# EAGLE board PCB (EAGLE 9.7.0)
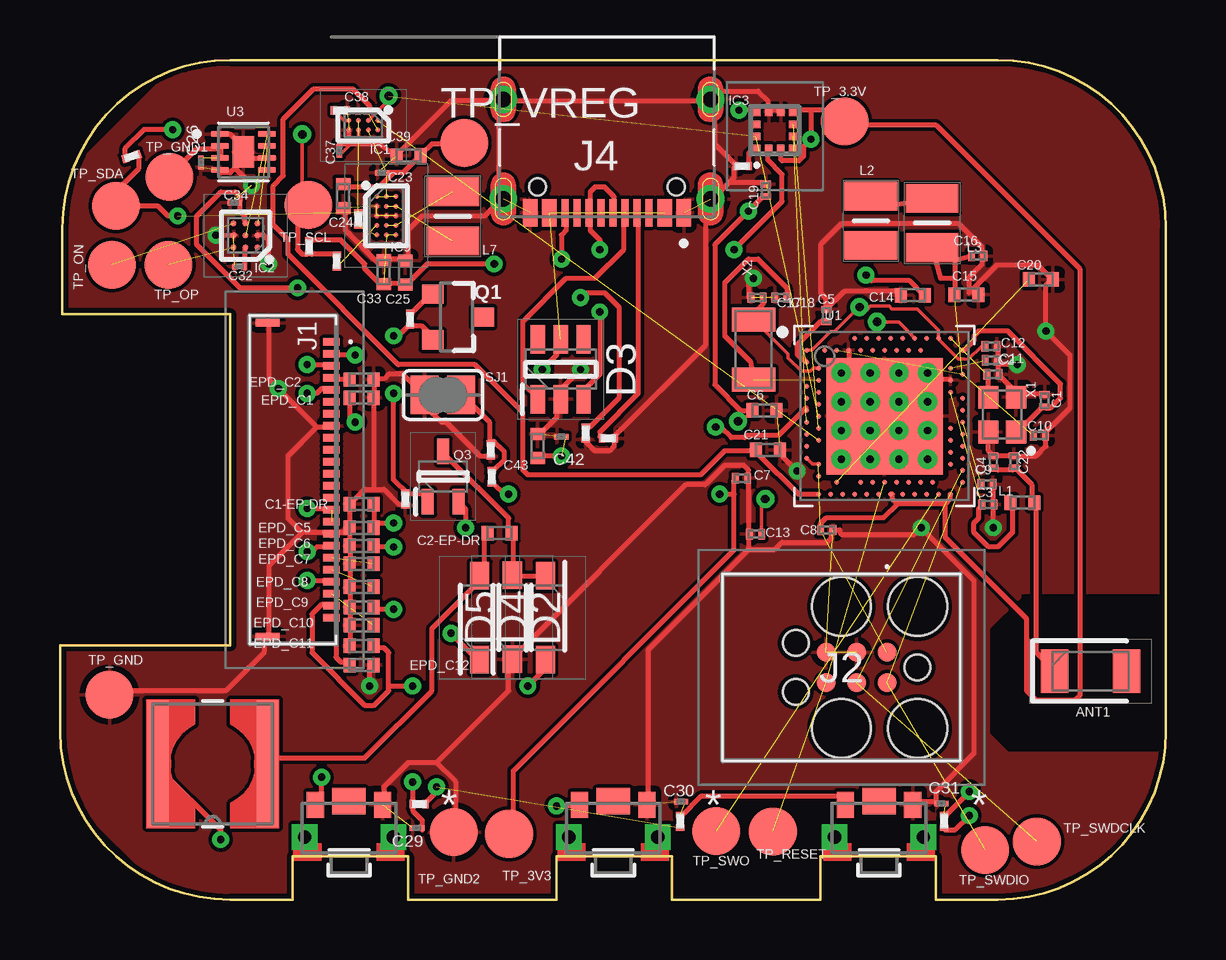
[diagram p0: board, top side]
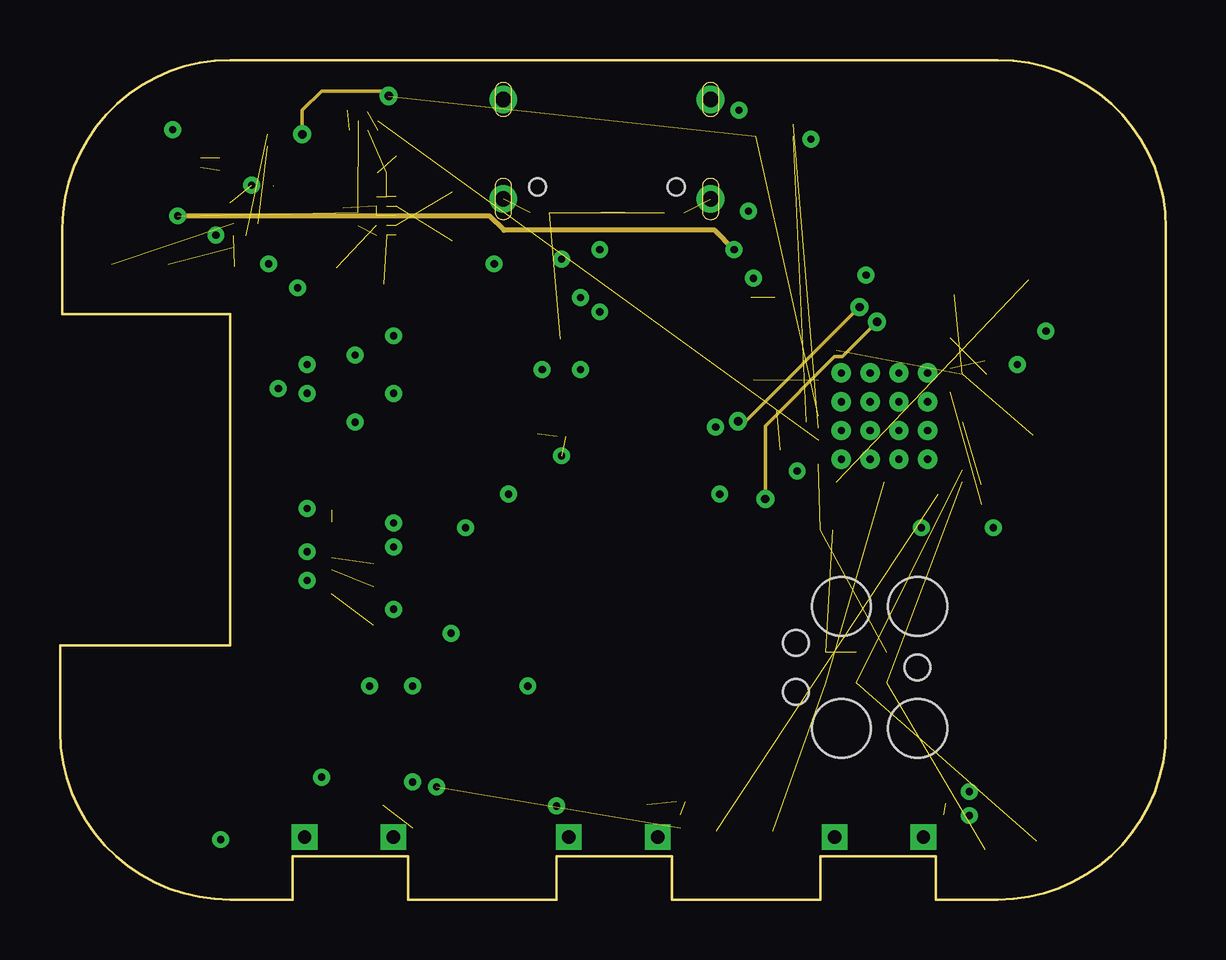
[diagram p1: board, inner layer Route2]
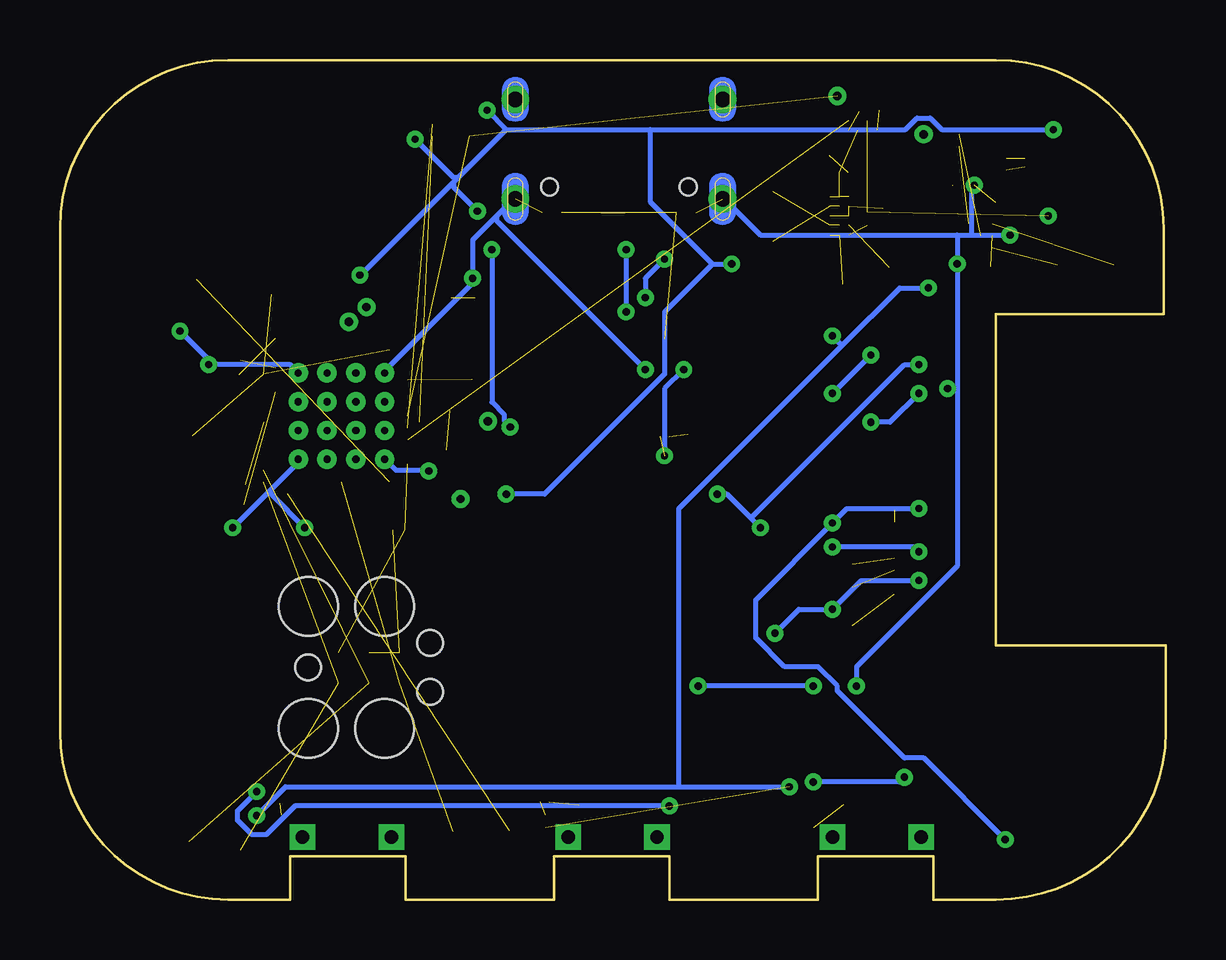
[diagram p2: board, bottom side, seen from below]

Size 46.1 x 35 mm. Coordinates in mm from the lower left corner, seen from the top.
Outline: 7.1,35 39.1,35 arc-90 46.1,28 46.1,7 arc-90 39.1,0 36.5,0 36.5,1.8 31.7,1.8 31.7,0 25.5,0 25.5,1.8 20.7,1.8 20.7,0 14.5,0 14.5,1.8 9.7,1.8 9.7,0 7.1,0 arc-90 0,7 0,10.6 7.1,10.6 7.1,24.4 0.1,24.4 0.1,28 arc-90 7.1,35
Copper layers (1+2*15+16): Top / Route2 / Route63 / Bottom
Stack-up 4 Layer Stack: Top SilkScreen Epoxy Ink / Top SolderMask SR:Green 0.0254mm Dk 4.3 / Top Surface Finish Lead-Free 0.02mm / Top CuFoil:007 0.035mm / Dielectric-1 Prepreg:001 0.064mm / Dielectric-2 Prepreg:001 0.064mm / Route2 CuFoil:007 0.035mm / Dielectric-3 Core:066 0.711mm / Route63 CuFoil:007 0.035mm / Dielectric-4 Prepreg:001 0.064mm / Dielectric-5 Prepreg:001 0.064mm / Bottom CuFoil:007 0.035mm / Bottom Surface Finish Lead-Free 0.02mm / Bottom SolderMask SR:Green 0.0254mm Dk 4.3 / Bottom SilkScreen Epoxy Ink
Design rules: minimum copper width 0.15mm, minimum drill size 0.2mm, copper clearance wire_polygon to wire_polygon 0.15mm, copper clearance wire_polygon to pad_smd 0.15mm, copper clearance wire_polygon to via 0.15mm, copper clearance pad_smd to pad_smd 0.15mm, copper clearance pad_smd to via 0.15mm, copper clearance via to via 0.15mm, copper clearance smd to pad (same net) 0.15mm, copper clearance smd to via (same net) 0.15mm, copper clearance smd to smd (same net) 0.15mm, dimension clearance 0.2mm, via restrict clearance 0mil, restrict clearance 0mil, drill distance 0.15mm, keepout clearance 0mil
RestrictTop: 2 lines
RestrictBottom: 7 lines
RestrictVias: 7 lines

## Footprints (pad centres in the part's own frame; a part is rotated, then mirrored left to right if it is on the bottom)
2450AT18B100E_ANTC3216X140N = smd 1.15 x 1.8: 1 -1.5,0; 2 1.5,0
NORDIC_NRF_3_RESC0201_L = smd 0.28 x 0.43: 1 -0.255,0; 2 0.255,0
NORDIC_NRF_3_RESC0402_L = smd 0.5 x 0.6: 1 -0.5,0; 2 0.5,0
GRM011R60J152KE01L_2_CAPC0201X13N = smd 0.22 x 0.23: 1 -0.185,0; 2 0.185,0
ESP32_C6_LIBRARY_5_SOD3716X135N = smd 1.15 x 0.8: 1 -1.75,0; 2 1.75,0
ESP32_C6_LIBRARY_3_SOT95P280X145-6N = smd 1.2 x 0.6: 1 -1.25,0.95; 2 -1.25,0; 3 -1.25,-0.95; 4 1.25,-0.95; 5 1.25,0; 6 1.25,0.95
BQ25180YBGR_BGA8C40P2X4_100X155X50 = smd 0.2 x 0.2: A1 -0.2,0.6; A2 0.2,0.6; B1 -0.2,0.2; B2 0.2,0.2; C1 -0.2,-0.2; C2 0.2,-0.2; D1 -0.2,-0.6; D2 0.2,-0.6
DRV2605YZFR_BGA9C50P3X3_144X144X62 = smd 0.25 x 0.25: A1 -0.5,0.5; A2 0,0.5; A3 0.5,0.5; B1 -0.5,0; B2 0,0; B3 0.5,0; C1 -0.5,-0.5; C2 0,-0.5; C3 0.5,-0.5
BMA423_BMA423 = smd 0.3 x 0.35: 1 -0.75,-0.775; 2 -0.25,-0.775; 3 0.25,-0.775; 4 0.75,-0.775; 7 0.75,0.775; 8 0.25,0.775; 9 -0.25,0.775; 10 -0.75,0.775 | smd 0.35 x 0.3: 5 0.775,-0.25; 6 0.775,0.25; 11 -0.775,0.25; 12 -0.775,-0.25
RT6160AWSC_BGA15C40P3X5_140X230X60 = smd 0.216 x 0.216: A1 -0.4,0.8; A2 0,0.8; A3 0.4,0.8; B1 -0.4,0.4; B2 0,0.4; B3 0.4,0.4; C1 -0.4,0; C2 0,0; C3 0.4,0; D1 -0.4,-0.4; D2 0,-0.4; D3 0.4,-0.4; E1 -0.4,-0.8; E2 0,-0.8; E3 0.4,-0.8
503480-2400_5034802400 = smd 0.3 x 0.7: 1 -5.75,1.525; 2 -5.25,1.525; 3 -4.75,1.525; 4 -4.25,1.525; 5 -3.75,1.525; 6 -3.25,1.525; 7 -2.75,1.525; 8 -2.25,1.525; 9 -1.75,1.525; 10 -1.25,1.525; 11 -0.75,1.525; 12 -0.25,1.525; 13 0.25,1.525; 14 0.75,1.525; 15 1.25,1.525; 16 1.75,1.525; 17 2.25,1.525; 18 2.75,1.525; 19 3.25,1.525; 20 3.75,1.525; 21 4.25,1.525; 22 4.75,1.525; 23 5.25,1.525; 24 5.75,1.525 | smd 0.3 x 1: MP1 -6.54,-1.125; MP2 6.54,-1.125
TC2030-IDC_TC2030IDC = smd 0.783 x 0.783: 1 -0.953,-0.635; 2 -0.953,0.635; 3 0.317,-0.635; 4 0.317,0.635; 5 1.588,-0.635; 6 1.588,0.635 | hole 2.451: -2.223,-2.54; -2.223,2.54; 0.952,-2.54; 0.952,2.54 | hole 1.067: -2.223,0; 2.857,-1.016; 2.857,1.016
KH-TYPE-C-16P_KINGHELM_KH-TYPE-C-16P = smd 0.6 x 1.15: A1_B12 -3.2,4.725; A4_B9 -2.4,4.725; A9_B4 2.4,4.725; A12_B1 3.2,4.725 | smd 0.3 x 1.15: A5 -1.25,4.725; A6 -0.25,4.725; A7 0.25,4.725; A8 1.25,4.725; B5 1.75,4.725; B6 0.75,4.725; B7 -0.75,4.725; B8 -1.75,4.725 | drill 0.65 pad 1.05: SH1 -4.32,0; SH2 4.32,0; SH3 -4.32,4.15; SH4 4.32,4.15 | hole 0.7: -2.89,3.65; 2.89,3.65
NORDIC_NRF_2_RESC0402_L = smd 0.5 x 0.6: 1 -0.5,0; 2 0.5,0
MLP2016SR47MT0S1_INDC2016X100N = smd 1.2 x 2.2: 1 -1.028,0; 2 1.028,0
ESP32_C6_LIBRARY_2_IND_4828-WE-TPC_WRE = smd 0.9 x 5.3: 1 -2.286,0; 2 2.286,0
ESP32_C6_LIBRARY_4_ESP32_C6_LIBRARY_4_ESP32_C6_LIBRARY_4_ESP32_C6_LIBRARY_4_ESP32_WROVER_SPARKFUN-DISCRETESEMI_SOT23-3 = smd 0.8 x 0.9: 1 -0.95,-1; 2 0.95,-1; 3 0,1.1
ESP32_C6_LIBRARY_6_SOT65P210X110-3N = smd 1.05 x 0.5: 1 -1.05,0.65; 2 -1.05,-0.65; 3 1.05,0
CPF0201D7K68C1_0201 = smd 0.35 x 0.25: 1 0,0.275; 2 0,-0.275
ESP32_C6_LIBRARY_7_JUMPER_SJ = smd 1.168 x 1.6: 1 -0.762,0; 2 0.762,0
2025-10-22_07-23-44_LIBRARY_SW_EVP-AKE31A_PAN = smd 0.711 x 1.092: 1 -1.4,-0.972; 2 1.4,-0.972 | drill 0.559 pad 0.914 square: 3 -1.848,0.381; 4 1.848,0.381 | smd 1.397 x 1.092: 5 0,-1.124
HECTOR_WATCH_1_TP20R = smd 2 x 2: TP 0,0
NORDIC_NRF_4_AQFN50P700X700X85_HS-74N = smd 4.85 x 4.85: P$74 0,0 | drill 0.3 pad 0.6: P$75 -1.8,1.8; P$76 -0.6,1.8; P$77 0.6,1.8; P$78 1.8,1.8; P$79 -1.8,0.6; P$80 -0.6,0.6; P$81 0.6,0.6; P$82 1.8,0.6; P$83 -1.8,-0.6; P$84 -0.6,-0.6; P$85 0.6,-0.6; P$86 1.8,-0.6; P$87 -1.8,-1.8; P$88 -0.6,-1.8; P$89 0.6,-1.8; P$90 1.8,-1.8 | smd 0.2 x 0.2: P$A8 -1.25,3.25; P$A10 -0.75,3.25; P$A12 -0.25,3.25; P$A14 0.25,3.25; P$A16 0.75,3.25; P$A18 1.25,3.25; P$A20 1.75,3.25; P$A22 2.25,3.25; P$A23 2.75,3.25; P$AA24 3.25,-2.25; P$AB2 -2.75,-2.5; P$AC5 -2,-2.75; P$AC9 -1,-2.75; P$AC11 -0.5,-2.75; P$AC13 0,-2.75; P$AC15 0.5,-2.75; P$AC17 1,-2.75; P$AC19 1.5,-2.75; P$AC21 2,-2.75; P$AC24 3.25,-2.75; P$AD2 -2.75,-3.25; P$AD4 -2.25,-3.25; P$AD6 -1.75,-3.25; P$AD8 -1.25,-3.25; P$AD10 -0.75,-3.25; P$AD12 -0.25,-3.25; P$AD14 0.25,-3.25; P$AD16 0.75,-3.25; P$AD18 1.25,-3.25; P$AD20 1.75,-3.25; P$AD22 2.25,-3.25; P$AD23 2.75,-3.25; P$B1 -3.25,2.75; P$B3 -2.5,2.75; P$B5 -2,2.75; P$B7 -1.5,2.75; P$B9 -1,2.75; P$B11 -0.5,2.75; P$B13 0,2.75; P$B15 0.5,2.75; P$B17 1,2.75; P$B19 1.5,2.75; P$B24 3.25,2.75; P$C1 -3.25,2.25; P$D2 -2.75,2; P$D23 2.75,2; P$E24 3.25,1.75; P$F2 -2.75,1.5; P$F23 2.75,1.5; P$G1 -3.25,1.25; P$H2 -2.75,1; P$H23 2.75,1; P$J1 -3.25,0.75; P$J24 3.25,0.75; P$K2 -2.75,0.5; P$L1 -3.25,0.25; P$L24 3.25,0.25; P$M2 -2.75,0; P$N1 -3.25,-0.25; P$N24 3.25,-0.25; P$P2 -2.75,-0.5; P$P23 2.75,-0.5; P$R1 -3.25,-0.75; P$R24 3.25,-0.75; P$T2 -2.75,-1; P$T23 2.75,-1; P$U1 -3.25,-1.25; P$U24 3.25,-1.25; P$V23 2.75,-1.5; P$W1 -3.25,-1.75; P$W24 3.25,-1.75; P$Y2 -2.75,-2; P$Y23 2.75,-2
ESP32_C6_LIBRARY_SON50P200X200X80-9N = smd 0.76 x 0.27: 1 -0.985,0.75; 2 -0.985,0.25; 3 -0.985,-0.25; 4 -0.985,-0.75; 5 0.985,-0.75; 6 0.985,-0.25; 7 0.985,0.25; 8 0.985,0.75 | smd 0.9 x 1.3: 9 0,0
NORDIC_NRF_BT-XTAL_2016_N = smd 0.95 x 0.85: 1 -0.725,-0.575; 2 0.725,-0.575; 3 0.725,0.575; 4 -0.725,0.575
NORDIC_NRF_1_XTAL_3215_N = smd 1 x 1.8: 1 -1.25,0; 2 1.25,0

## Placement (x,y rotation side)
ANT1  2450AT18B100E  [2450AT18B100E_ANTC3216X140N]  42.96,9.52 0 top
C1  12pF  [NORDIC_NRF_3_RESC0201_L]  41.04,20.79 90 top
C1-EP-DR  10uF  [NORDIC_NRF_3_RESC0402_L]  12.57,16.48 180 top
C2  12pF  [NORDIC_NRF_3_RESC0201_L]  38.89,21.89 0 top
C2-EP-DR  4.7uF/25V  [NORDIC_NRF_3_RESC0402_L]  18.31,15.27 180 top
C3  1pF  [NORDIC_NRF_3_RESC0201_L]  38.68,16.47 0 top
C4  1pF  [NORDIC_NRF_3_RESC0201_L]  38.9,18.24 90 top
C5  100nF  [NORDIC_NRF_3_RESC0201_L]  31.95,24.35 90 top
C6  4.7µF  [NORDIC_NRF_3_RESC0402_L]  29.35,20.39 0 top
C7  100nF  [NORDIC_NRF_3_RESC0201_L]  28.41,17.56 0 top
C8  100nF  [NORDIC_NRF_3_RESC0201_L]  31.96,15.41 0 top
C9  820pF  [NORDIC_NRF_3_RESC0201_L]  38.64,17.31 0 top
C10  N.C.  [NORDIC_NRF_3_RESC0201_L]  40.82,19.34 0 top
C11  100pF  [NORDIC_NRF_3_RESC0201_L]  38.82,22.48 0 top
C12  100nF  [NORDIC_NRF_3_RESC0201_L]  38.81,23.06 0 top
C13  N.C.  [NORDIC_NRF_3_RESC0201_L]  28.99,15.23 180 top
C14  4.7µF  [NORDIC_NRF_3_RESC0402_L]  35.55,25.19 180 top
C15  1.0µF  [NORDIC_NRF_3_RESC0402_L]  37.77,25.21 0 top
C16  100nF  [NORDIC_NRF_3_RESC0201_L]  38.26,26.83 0 top
C17  12pF  [NORDIC_NRF_3_RESC0201_L]  29.06,25.09 0 top
C18  12pF  [NORDIC_NRF_3_RESC0201_L]  30.05,25.09 0 top
C19  100nF  [NORDIC_NRF_3_RESC0201_L]  29.42,29.56 90 top
C20  4.7µF  [NORDIC_NRF_3_RESC0402_L]  40.89,25.85 0 top
C21  4.7µF  [NORDIC_NRF_3_RESC0402_L]  29.5,18.74 0 top
C22  N.C.  [NORDIC_NRF_3_RESC0201_L]  39.76,18.24 90 top
C23  0.1uF  [GRM011R60J152KE01L_2_CAPC0201X13N]  13.42,30.29 0 top
C24  10uF  [NORDIC_NRF_3_RESC0402_L]  11.81,29.33 90 top
C25  22uF  [NORDIC_NRF_3_RESC0402_L]  14.39,26.13 90 top
C26  0.1uF  [GRM011R60J152KE01L_2_CAPC0201X13N]  5.87,30.72 90 top
C29  1uF  [GRM011R60J152KE01L_2_CAPC0201X13N]  14.88,2.98 0 top
C30  1uF  [GRM011R60J152KE01L_2_CAPC0201X13N]  25.89,4.08 0 top
C31  1uF  [GRM011R60J152KE01L_2_CAPC0201X13N]  36.75,4 0 top
C32  1uF  [GRM011R60J152KE01L_2_CAPC0201X13N]  7.47,26.38 0 top
C33  22uF  [NORDIC_NRF_3_RESC0402_L]  13.49,26.15 90 top
C34  0.1uF  [GRM011R60J152KE01L_2_CAPC0201X13N]  7.27,29.04 0 top
C37  1uF  [GRM011R60J152KE01L_2_CAPC0201X13N]  11.65,31.22 270 top
C38  1uF  [GRM011R60J152KE01L_2_CAPC0201X13N]  12.61,32.84 0 top
C39  10uF  [NORDIC_NRF_3_RESC0402_L]  14.53,31.02 180.4 top
C42  0.1uF  [GRM011R60J152KE01L_2_CAPC0201X13N]  20.89,19.29 0 top
C43  4.7uF  [NORDIC_NRF_3_RESC0402_L]  19.92,18.91 90 top
D2  MBR0530  [ESP32_C6_LIBRARY_5_SOD3716X135N]  20.23,11.74 270 top
D3  USBLC6-2SC6Y  [ESP32_C6_LIBRARY_3_SOT95P280X145-6N]  20.87,22.1 90 top
D4  MBR0530  [ESP32_C6_LIBRARY_5_SOD3716X135N]  18.85,11.76 90 top
D5  MBR0530  [ESP32_C6_LIBRARY_5_SOD3716X135N]  17.49,11.75 90 top
EPD_C1  1uF/50V  [NORDIC_NRF_3_RESC0402_L]  12.57,20.92 180 top
EPD_C2  1uF/50V  [NORDIC_NRF_3_RESC0402_L]  12.57,21.68 180 top
EPD_C5  0.1uF/50V  [NORDIC_NRF_3_RESC0402_L]  12.57,15.5 0 top
EPD_C6  1uF/50V  [NORDIC_NRF_3_RESC0402_L]  12.57,14.74 0 top
EPD_C7  1uF/50V  [NORDIC_NRF_3_RESC0402_L]  12.57,13.99 0 top
EPD_C8  1uF/50V  [NORDIC_NRF_3_RESC0402_L]  12.57,13.04 0 top
EPD_C9  1uF/50V  [NORDIC_NRF_3_RESC0402_L]  12.57,12.19 0 top
EPD_C10  1uF/50V  [NORDIC_NRF_3_RESC0402_L]  12.57,11.43 0 top
EPD_C11  1uF/50V  [NORDIC_NRF_3_RESC0402_L]  12.57,10.58 0 top
EPD_C12  1uF/50V  [NORDIC_NRF_3_RESC0402_L]  12.58,9.77 180 top
IC1  BQ25180YBGR  [BQ25180YBGR_BGA8C40P2X4_100X155X50]  12.64,32.27 270 top
IC2  DRV2605YZFR  [DRV2605YZFR_BGA9C50P3X3_144X144X62]  7.74,27.68 180 top
IC3  BMA421  [BMA423_BMA423]  29.79,32.06 0 top
IC9  RT6160AWSC  [RT6160AWSC_BGA15C40P3X5_140X230X60]  13.6,28.5 0 top
J1  503480-2400_503480-2400  [503480-2400_5034802400]  9.79,17.5 270 top
J2  TC2030-IDC  [TC2030-IDC_TC2030IDC]  33.52,9.67 180 top
J4  KH-TYPE-C-16P  [KH-TYPE-C-16P_KINGHELM_KH-TYPE-C-16P]  22.8,33.36 180 top
L1  3.9nH  [NORDIC_NRF_2_RESC0402_L]  40.11,16.54 0 top
L2  10µH  [MLP2016SR47MT0S1_INDC2016X100N]  33.8,28.3 90 top
L3  15nH  [MLP2016SR47MT0S1_INDC2016X100N]  36.35,28.2 270 top
L5  68uH  [ESP32_C6_LIBRARY_2_IND_4828-WE-TPC_WRE]  6.37,5.66 180 top
L7  FTC252012SR47MBCA  [MLP2016SR47MT0S1_INDC2016X100N]  16.37,28.48 90 top
Q1  20V/4.2A/52mΩ/1.4W  [ESP32_C6_LIBRARY_4_ESP32_C6_LIBRARY_4_ESP32_C6_LIBRARY_4_ESP32_C6_LIBRARY_4_ESP32_WROVER_SPARKFUN-DISCRETESEMI_SOT23-3]  16.53,24.28 270 top
Q3  SI1308EDL-T1-GE3  [ESP32_C6_LIBRARY_6_SOT65P210X110-3N]  15.97,17.63 90 top
R1_EP_DR  0.47  [CPF0201D7K68C1_0201]  17.99,17.63 0 top
R1_USB  5K1  [CPF0201D7K68C1_0201]  22.86,19.23 270 top
R2  0  [CPF0201D7K68C1_0201]  12.43,28.37 0 top
R2_EP_DR  10k  [CPF0201D7K68C1_0201]  14.39,16.69 180 top
R2_USB  5K1  [CPF0201D7K68C1_0201]  21.92,19.45 0 top
R3  0  [CPF0201D7K68C1_0201]  28.44,30.57 90 top
R4  0  [CPF0201D7K68C1_0201]  11.53,26.61 0 top
R5  10k  [CPF0201D7K68C1_0201]  25.85,3.27 0 top
R7  10k  [CPF0201D7K68C1_0201]  14.97,3.97 90 top
R8  10k  [CPF0201D7K68C1_0201]  36.85,3.27 0 top
R9  10k  [CPF0201D7K68C1_0201]  11.69,32.9 270 top
R17  3K3  [CPF0201D7K68C1_0201]  10.38,27.21 0 top
R18  3K3  [CPF0201D7K68C1_0201]  2.98,30.97 108.6 top
R_PWR_EPD  10k  [CPF0201D7K68C1_0201]  14.59,24.19 0 top
R_TYPE_SEL  2.2  [CPF0201D7K68C1_0201]  17.95,18.75 180 top
SJ1  [ESP32_C6_LIBRARY_7_JUMPER_SJ]  15.96,21.03 0 top
SW_DN  2025-10-22_07-23-44_LIBRARY_EVP-AKE31ASW_EVP-AKE31A_PAN  [2025-10-22_07-23-44_LIBRARY_SW_EVP-AKE31A_PAN]  12.05,2.98 180 top
SW_ENT  2025-10-22_07-23-44_LIBRARY_EVP-AKE31ASW_EVP-AKE31A_PAN  [2025-10-22_07-23-44_LIBRARY_SW_EVP-AKE31A_PAN]  23.06,2.98 180 top
SW_UP  2025-10-22_07-23-44_LIBRARY_EVP-AKE31ASW_EVP-AKE31A_PAN  [2025-10-22_07-23-44_LIBRARY_SW_EVP-AKE31A_PAN]  34.14,2.98 180 top
TP_3.3V  HECTOR_WATCH_1_TPTP20R  [HECTOR_WATCH_1_TP20R]  32.7,32.43 0 top
TP_3V3  HECTOR_WATCH_1_TPTP20R  [HECTOR_WATCH_1_TP20R]  18.72,2.74 0 top
TP_GND  HECTOR_WATCH_1_TPTP20R  [HECTOR_WATCH_1_TP20R]  2.07,8.53 0 top
TP_GND1  HECTOR_WATCH_1_TPTP20R  [HECTOR_WATCH_1_TP20R]  4.56,30.12 0 top
TP_GND2  HECTOR_WATCH_1_TPTP20R  [HECTOR_WATCH_1_TP20R]  16.41,2.81 0 top
TP_ON  HECTOR_WATCH_1_TPTP20R  [HECTOR_WATCH_1_TP20R]  2.17,26.47 0 top
TP_OP  HECTOR_WATCH_1_TPTP20R  [HECTOR_WATCH_1_TP20R]  4.52,26.47 0 top
TP_RESET  HECTOR_WATCH_1_TPTP20R  [HECTOR_WATCH_1_TP20R]  29.72,2.84 0 top
TP_SCL  HECTOR_WATCH_1_TPTP20R  [HECTOR_WATCH_1_TP20R]  10.35,28.95 0 top
TP_SDA  HECTOR_WATCH_1_TPTP20R  [HECTOR_WATCH_1_TP20R]  2.33,28.91 0 top
TP_SWDCLK  HECTOR_WATCH_1_TPTP20R  [HECTOR_WATCH_1_TP20R]  40.72,2.43 0 top
TP_SWDIO  HECTOR_WATCH_1_TPTP20R  [HECTOR_WATCH_1_TP20R]  38.57,2.07 0 top
TP_SWO  HECTOR_WATCH_1_TPTP20R  [HECTOR_WATCH_1_TP20R]  27.36,2.86 0 top
TP_VREG  HECTOR_WATCH_1_TPTP20R  [HECTOR_WATCH_1_TP20R]  16.85,31.53 0 top
U1  NRF52840_QF  [NORDIC_NRF_4_AQFN50P700X700X85_HS-74N]  34.37,20.15 0 top
U3  MAX17048G+T10  [ESP32_C6_LIBRARY_SON50P200X200X80-9N]  7.64,31.16 0 top
X1  32MHz  [NORDIC_NRF_BT-XTAL_2016_N]  39.27,20.21 90 top
X2  32.768kHz  [NORDIC_NRF_1_XTAL_3215_N]  28.91,22.93 270 top

## Library data of the parts
ANT1 = InkTime_v5; ARROW_PART_NUMBER: 2450AT18B100E; ARROW_PRICE-STOCK: https://www.arrow.com/en/products/2450at18b100e/johanson-dielectrics?utm_currency=USD&region=nac; DESCRIPTION: Antennas 2.45GHz ANTENNA; HEIGHT: 1.4mm; MANUFACTURER_NAME: JOHANSON TECHNOLOGY; MANUFACTURER_PART_NUMBER: 2450AT18B100E; MOUSER_PART_NUMBER: 609-2450AT18B100E; MOUSER_PRICE-STOCK: https://www.mouser.co.uk/ProductDetail/Johanson-Technology/2450AT18B100E?qs=yCnrNFeXz%252Bh5MFsFIXGZGA%3D%3D
C1 C1-EP-DR C2 C2-EP-DR C3-C22 C24 C25 C33 C39 C43 EPD_C1 EPD_C2 EPD_C5-EPD_C12 L1 R1_EP_DR R1_USB R2 R2_EP_DR R2_USB R3-R5 R7-R9 R17 R18 R_PWR_EPD R_TYPE_SEL SJ1 TP_3.3V TP_3V3 TP_GND TP_GND1 TP_GND2 TP_ON TP_OP TP_RESET TP_SCL TP_SDA TP_SWDCLK TP_SWDIO TP_SWO TP_VREG U1 X1 X2 = InkTime_v5
C23 C26 C29-C32 C34 C37 C38 C42 = InkTime_v5; AVAILABILITY: In Stock; CHECK_PRICES: https://www.snapeda.com/parts/GRM011R60J152KE01L/Murata/view-part/?ref=eda; DESCRIPTION: SMD Capacitor X5R(EIA) with Capacitance: 1500pF Tol. 10%. Rated Voltage: 6.3Vdc; MF: Murata; MP: GRM011R60J152KE01L; PACKAGE: 0201 Murata; PRICE: None; SNAPEDA_LINK: https://www.snapeda.com/parts/GRM011R60J152KE01L/Murata/view-part/?ref=snap
D2 D4 D5 = InkTime_v5; AVAILABILITY: In Stock; CHECK_PRICES: https://www.snapeda.com/parts/MBR0530/Onsemi/view-part/?ref=eda; DESCRIPTION: Diode Schottky 30 V 500mA Surface Mount SOD-123; MF: ON Semiconductor; MP: MBR0530; PACKAGE: SOD-123-2 ON Semiconductor; PRICE: None; PURCHASE-URL: https://www.snapeda.com/api/url_track_click_mouser/?unipart_id=179458&manufacturer=ON Semiconductor&part_name=MBR0530&search_term=None; SNAPEDA_LINK: https://www.snapeda.com/parts/MBR0530/Onsemi/view-part/?ref=snap
D3 = InkTime_v5; AVAILABILITY: In Stock; CHECK_PRICES: https://www.snapeda.com/parts/USBLC6-2SC6Y/STMicroelectronics/view-part/?ref=eda; DESCRIPTION: 17V Clamp 5A (8/20µs) Ipp Tvs Diode Surface Mount SOT-23-6; MF: STMicroelectronics; MP: USBLC6-2SC6Y; PACKAGE: SOT-23-6 STMicroelectronics; PRICE: None; SNAPEDA_LINK: https://www.snapeda.com/parts/USBLC6-2SC6Y/STMicroelectronics/view-part/?ref=snap
IC1 = InkTime_v5; ARROW_PART_NUMBER: BQ25180YBGR; ARROW_PRICE-STOCK: https://www.arrow.com/en/products/bq25180ybgr/texas-instruments?utm_currency=USD&region=nac; DESCRIPTION: Charger IC Lithium Ion/Polymer, Lithium Iron Phosphate 8-DSBGA (1.6x1.1); HEIGHT: 0.5mm; MANUFACTURER_NAME: Texas Instruments; MANUFACTURER_PART_NUMBER: BQ25180YBGR; MOUSER_PART_NUMBER: 595-BQ25180YBGR; MOUSER_PRICE-STOCK: https://www.mouser.co.uk/ProductDetail/Texas-Instruments/BQ25180YBGR?qs=doiCPypUmgEWjAK%252BJAX6Tw%3D%3D
IC2 = InkTime_v5; ARROW_PART_NUMBER: DRV2605YZFR; ARROW_PRICE-STOCK: https://www.arrow.com/en/products/drv2605yzfr/texas-instruments?region=nac; DESCRIPTION: Haptic Driver for ERM/LRA with Built-In Library and Smart Loop Architecture; HEIGHT: 0.625mm; MANUFACTURER_NAME: Texas Instruments; MANUFACTURER_PART_NUMBER: DRV2605YZFR
IC3 = InkTime_v5; ARROW_PART_NUMBER: BMA423; ARROW_PRICE-STOCK: https://www.arrow.com/en/products/bma423/bosch; DESCRIPTION: Accelerometers Triaxial low-g 12bit Acceleration Sensor; HEIGHT: 1mm; MANUFACTURER_NAME: BOSCH; MANUFACTURER_PART_NUMBER: BMA423; MOUSER_PART_NUMBER: 262-BMA423; MOUSER_PRICE-STOCK: https://www.mouser.co.uk/ProductDetail/Bosch-Sensortec/BMA423?qs=HXFqYaX1Q2xC%252BSgeGoX3mg%3D%3D
IC9 = InkTime_v5; DESCRIPTION: Buck-Boost Regulator Positive Output Step-Up/Step-Down I2C DC-DC Controller IC 15-WL-CSP (BSC) (1.4x2.3); HEIGHT: 0.6mm; MANUFACTURER_NAME: RICHTEK; MANUFACTURER_PART_NUMBER: RT6160AWSC; MOUSER_PART_NUMBER: 835-RT6160AWSC; MOUSER_PRICE-STOCK: https://www.mouser.co.uk/ProductDetail/Richtek/RT6160AWSC?qs=amGC7iS6iy%2FLd9PSoixZXQ%3D%3D
J1 = InkTime_v5; DESCRIPTION: FFC & FPC Connectors 0.5mm FPC RA SMT Dual Contact 24Ckt; HEIGHT: 1.87mm; MANUFACTURER_NAME: Molex; MANUFACTURER_PART_NUMBER: 503480-2400; MOUSER_PART_NUMBER: 538-503480-2400; MOUSER_PRICE-STOCK: https://www.mouser.co.uk/ProductDetail/Molex/503480-2400?qs=OAhjpuo3Vu7efIoxFh9AOw%3D%3D
J2 = InkTime_v5; DESCRIPTION: CABLE ADAPTER 6 POS; HEIGHT: 19mm; MANUFACTURER_NAME: Tag Connect; MANUFACTURER_PART_NUMBER: TC2030-IDC
J4 = InkTime_v5; AVAILABILITY: Not in stock; CHECK_PRICES: https://www.snapeda.com/parts/KH-TYPE-C-16P/Kinghelm/view-part/?ref=eda; MF: kinghelm; MP: KH-TYPE-C-16P; PACKAGE: None; PRICE: None; SNAPEDA_LINK: https://www.snapeda.com/parts/KH-TYPE-C-16P/Kinghelm/view-part/?ref=snap
L2 L3 L7 = InkTime_v5; DESCRIPTION: SMD / SMT Inductors (Coils), L=0.47?H, L x W x T :; HEIGHT: 1mm; JLCPCB: https://jlcpcb.com/partdetail/6763488-FTC252012SR47MBCA/C5832368; MANUFACTURER_NAME: TDK; MANUFACTURER_PART_NUMBER: FTC252012SR47MBCA
L5 = InkTime_v5; COPYRIGHT: Copyright (C) 2024 Ultra Librarian. All rights reserved.; MANUFACTURER_PART_NUMBER: 744043680; MFR_NAME: Wurth Electronics
Q1 = InkTime_v5; PROD_ID: TRAN-14388
Q3 = InkTime_v5; AVAILABILITY: In Stock; CHECK_PRICES: https://www.snapeda.com/parts/SI1308EDL-T1-GE3/Vishay+Siliconix/view-part/?ref=eda; DESCRIPTION: Si1308EDL-T1-GE3 N-channel MOSFET Transistor, 1.5 A, 30 V, 3-Pin SC-70 | Siliconix / Vishay SI1308EDL-T1-GE3; MF: Vishay Siliconix; MP: SI1308EDL-T1-GE3; PACKAGE: SOT-323 Vishay Semiconductor; PRICE: None; PURCHASE-URL: https://www.snapeda.com/api/url_track_click_mouser/?unipart_id=274603&manufacturer=Vishay Siliconix&part_name=SI1308EDL-T1-GE3&search_term=None; SNAPEDA_LINK: https://www.snapeda.com/parts/SI1308EDL-T1-GE3/Vishay+Siliconix/view-part/?ref=snap
SW_DN SW_ENT SW_UP = InkTime_v5; COPYRIGHT: Copyright (C) 2025 Ultra Librarian. All rights reserved.; DIGI-KEY_PART_NUMBER_1: P123437TR-ND; DIGI-KEY_PART_NUMBER_2: P123437CT-ND; DIGI-KEY_PART_NUMBER_3: P123437DKR-ND; MANUFACTURER_NAME: Panasonic; MANUFACTURER_PART_NUMBER: EVP-AKE31A
U3 = InkTime_v5; AVAILABILITY: In Stock; CHECK_PRICES: https://www.snapeda.com/parts/MAX17048G+T10/Analog+Devices/view-part/?ref=eda; DESCRIPTION: 3µA 1-Cell/2-Cell Fuel Gauge with ModelGauge; MF: Analog Devices; MP: MAX17048G+T10; PACKAGE: TDFN-8 Maxim; PRICE: None; PURCHASE-URL: https://www.snapeda.com/api/url_track_click_mouser/?unipart_id=329239&manufacturer=Analog Devices&part_name=MAX17048G+T10&search_term=None; SNAPEDA_LINK: https://www.snapeda.com/parts/MAX17048G+T10/Analog+Devices/view-part/?ref=snap

## Nets
3V3/1.7D: C34.2 IC2.C2 Q1.2 R5.2 R7.2 R8.2 R_PWR_EPD.2
3V3/2.4A: C6.1 C7.1 C8.1 C12.1 C14.1 C19.1 C25.1 C33.1 IC3.3 IC3.7 IC3.10 IC9.E2 IC9.E3 J2.1 R17.1 R18.1 TP_3.3V.TP TP_3V3.TP U1.P$A22 U1.P$AD14 U1.P$AD23 U1.P$B1 U1.P$W1 U1.P$Y2
ALERT/1.6C: U3.5
ALERT/2.5C: U1.P$J24
D+/1.5D: D3.4
D+/2.7D: U1.P$AD6
D-/1.5D: D3.6
D-/2.7D: U1.P$AD4
DEC4_6: C10.1 C15.1 C16.1 L3.2 U1.P$B5 U1.P$E24
DN: D3.1 J4.A7 J4.B7
DP: D3.3 J4.A6 J4.B6
EPD_3V3: C1-EP-DR.1 EPD_C5.2 J1.15 J1.16 L5.2
EPD_BUSY/1.5D: J1.9
EPD_BUSY/2.2D: U1.P$AD12
EPD_CS/1.4C: J1.12
EPD_CS/2.2D: U1.P$K2
EPD_DC/1.5D: J1.11
EPD_DC/2.2D: U1.P$AD10
EPD_RST/1.5D: J1.10
EPD_RST/2.2D: U1.P$AC11
GDR: J1.2 Q3.1 R2_EP_DR.2
GND: C1-EP-DR.2 C1.2 C2.2 C3.2 C4.2 C5.2 C6.2 C7.2 C8.2 C9.2 C10.2 C11.2 C12.2 C13.2 C14.2 C15.2 C16.2 C17.1 C18.1 C19.2 C20.2 C21.2 C22.2 C23.1 C24.1 C25.2 C26.1 C29.1 C30.1 C31.1 C32.1 C33.2 C34.1 C37.1 C38.1 C39.2 C42.1 C43.2 D3.2 D4.1 EPD_C1.1 EPD_C2.1 EPD_C5.1 EPD_C6.1 EPD_C7.1 EPD_C8.1 EPD_C9.1 EPD_C10.1 EPD_C11.1 EPD_C12.1 IC1.D2 IC2.B1 IC2.B3 IC3.8 IC3.9 IC9.B1 IC9.C1 IC9.C2 IC9.C3 J1.8 J1.17 J1.MP1 J1.MP2 J2.3 J2.5 J4.A1_B12 J4.A12_B1 J4.SH1 J4.SH2 J4.SH3 J4.SH4 R1_USB.1 R2_EP_DR.1 R2_USB.2 R3.1 R9.1 R_TYPE_SEL.1 SJ1.1 SW_DN.1 SW_ENT.1 SW_UP.1 TP_GND2.TP TP_GND.TP U1.P$74 U1.P$75 U1.P$76 U1.P$77 U1.P$78 U1.P$79 U1.P$80 U1.P$81 U1.P$82 U1.P$83 U1.P$84 U1.P$85 U1.P$86 U1.P$87 U1.P$88 U1.P$89 U1.P$90 U1.P$B7 U1.P$F23 U3.1 U3.4 U3.6 U3.9 X1.2 X1.4
HAPTIC_EN/1.4C: IC2.A1
HAPTIC_EN/2.6A: U1.P$U1
IMU_INT1: IC3.5 U1.P$N1
IMU_INT2: IC3.6 U1.P$P2
LX1: IC9.B2 IC9.B3 L7.1
LX2: IC9.D2 IC9.D3 L7.2
MOSI/1.5B: J1.14
MOSI/2.2D: U1.P$B13
N$1: C9.1 U1.P$N24
N$2: C3.1 L1.1 U1.P$H23
N$3: ANT1.1 C4.1 C22.1 L1.2
N$4: C1.1 U1.P$B24 X1.1
N$5: C2.1 U1.P$A23 X1.3
N$6: C11.1 U1.P$D23
N$7: C5.1 U1.P$C1
N$9: C13.1 U1.P$A18
N$10: J4.A5 R1_USB.2
N$11: U1.P$B3
N$12: C17.2 U1.P$D2 X2.1
N$13: C18.2 U1.P$F2 X2.2
N$14: IC1.D1 R9.2
N$15: C20.1 U1.P$AC5
N$16: C2-EP-DR.2 D5.2 L5.1
N$17: IC9.D1 R4.2
N$18: C2-EP-DR.1 D2.1 D4.2 Q3.3
N$19: IC9.E1 R2.2
N$20: J4.B5 R2_USB.1
N$21: EPD_C2.2 J1.4
N$22: IC3.1 R3.2
N$23: C32.2 IC2.A2
N$24: EPD_C1.2 J1.5
N$25: R1_EP_DR.1 R_TYPE_SEL.2 SJ1.2
N$26: L2.1
N$27: L2.2 L3.1
N$32: EPD_C6.2 J1.18
N$34: EPD_C7.2 J1.19
N$35: EPD_C8.2 J1.20
N$37: EPD_C10.2 J1.22
N$39: EPD_C12.2 J1.24
OUT+: IC2.A3 TP_OP.TP
OUT-: IC2.C3 TP_ON.TP
P0.04: U1.P$J1
P0.09: U1.P$L24
P0.13/1.5D: C30.2 R5.1 SW_UP.2
P0.13/2.6C: U1.P$AD8
P0.14/1.5D: C31.2 R8.1 SW_ENT.2
P0.14/2.7C: U1.P$AC9
P0.19: U1.P$AC15
P0.20: U1.P$AD16
P0.21: U1.P$AC17
P0.22: U1.P$AD18
P0.23: U1.P$AC19
P0.24: U1.P$AD20
P0.25: U1.P$AC21
P0.26: U1.P$G1
P0.27: U1.P$H2
P0.28: U1.P$B11
P0.29: U1.P$A10
P0.30: U1.P$B9
P0.31: U1.P$A8
P1.01/1.6C: Q1.1 R_PWR_EPD.1
P1.01/2.4B: U1.P$Y23
P1.02/1.6C: C29.2 R7.1 SW_DN.2
P1.02/2.8C: U1.P$W24
P1.03: U1.P$V23
P1.04: U1.P$U24
P1.05: U1.P$T23
P1.06: U1.P$R24
P1.07: U1.P$P23
P1.09: U1.P$R1
P1.10: U1.P$A20
P1.11: U1.P$B19
P1.12: U1.P$B17
P1.13: U1.P$A16
P1.14: U1.P$B15
P1.15: U1.P$A14
PD_3V3: Q1.3
PMIC_INT: IC1.A1 U1.P$T2
PREVGH: D5.1 EPD_C9.2 J1.21
PREVGL: D2.2 EPD_C11.2 J1.23
RESE: J1.3 Q3.2 R1_EP_DR.2
RESET: J2.6 TP_RESET.TP U1.P$AC13
SCK/1.5B: J1.13
SCK/2.2D: U1.P$A12
SCL/1.4C: IC2.C1 U3.7
SCL/2.4C: IC1.B1 IC3.12 R4.1 R17.2 TP_SCL.TP U1.P$M2
SDA/1.4C: IC2.B2 U3.8
SDA/2.4C: IC1.C1 IC3.2 R2.1 R18.2 TP_SDA.TP U1.P$L1
SWDCLK: J2.4 TP_SWDCLK.TP U1.P$AA24
SWDIO: J2.2 TP_SWDIO.TP U1.P$AC24
SWO: TP_SWO.TP U1.P$AD22
VBAT/1.2A: C26.2 TP_GND1.TP U3.2 U3.3
VBAT/2.5C: C37.2 IC1.C2
VBUS/1.5D: C42.2 C43.1 D3.5 J4.A4_B9 J4.A9_B4
VBUS/2.6D: C21.1 C38.2 IC1.A2 U1.P$AD2
VREG: C23.2 C24.2 C39.1 IC1.B2 IC9.A1 IC9.A2 IC9.A3 TP_VREG.TP

## Tracks (layer width: path | path; a pad name or v marks a point on that pad's centre or on a via)
3V3/1.7D  (via drill 0.3)  (1 unrouted)
  Top 0.2: Q1.2 15.5,23.5 15.1,23.9 14.7,23.9 R_PWR_EPD.2 14.5,23.9 14.1,23.5 v13.9,23.5 | 7.5,29.1 7.5,28.7 7.7,28.5 7.7,28.3 IC2.C2 | v15.7,4.7 15.7,4.5 15.3,4.1 R7.2 | v37.9,3.5 37.3,2.9 36.9,2.9 R8.2 | 7.5,29.1 7.5,29.3 7.3,29.5 6.7,29.5 5.7,28.5 5.7,27.3 7.5,25.5 v9.9,25.5 | 7.5,29.1 C34.2
  Bottom 0.2: 20.3,4.7 36.7,4.7 v37.9,3.5 | 20.3,4.7 v15.7,4.7 | v9.9,25.5 11.1,25.5 13.5,23.1 | 13.5,23.1 20.3,16.3 20.3,4.7 | 13.5,23.1 v13.9,23.5
3V3/2.4A  (via drill 0.3, 0.35)  (4 unrouted)
  Top 0.15: U1.P$B1 31.34,22.9 32.12,23.68 32.28,23.68 33.18,24.58 33.45,24.58 | v28.26,19.94 28.4,19.94 C6.1 | C12.1 38.4,23.06 37.86,22.52 37.85,22.52 37.84,22.52 37.69,22.52 37.47,22.52 37.46,22.53 37.45,22.53 37.35,22.64 36.62,23.37 U1.P$A22 36.62,23.73 35.73,24.62 34.68,24.62 34.57,24.73 33.79,24.73 33.64,24.58 33.45,24.58 | v33.33,24.7 33.45,24.58 | U1.P$Y2 31.37,18.15 U1.P$W1
  Top 0.2: 28.1,16.9 28.1,17.5 C7.1 | TP_3V3.TP 18.9,2.9 18.9,5.37 28.1,14.57 28.1,16.9 | C19.1 29.3,29.3 v28.7,28.7 27.3,27.3 27.3,21.47 28.37,20.39 C6.1 | 34.9,16.5 34.7,16.7 34.7,16.9 U1.P$AD14 | 36.9,16.5 34.9,16.5 | 36.9,16.5 37.1,16.7 37.1,16.9 U1.P$AD23 | C8.1 31.7,15.6 31.7,15.67 31.95,15.92 34.32,15.92 34.9,16.5 | R17.1 10.5,27.5 11.7,27.5 12.7,26.5 12.7,26.3 13.3,25.7 C33.1 13.5,25.7 14.3,25.7 C25.1 14.5,25.7 15.3,26.5 v18.1,26.5 | 31.3,32.9 32.3,32.9 32.7,32.5 TP_3.3V.TP 32.9,32.3 36.5,32.3 42.5,26.3 42.5,8.5 42.3,8.3 40.7,8.3 40.3,8.7 40.3,11.7 36.9,15.1 36.9,16.5 | 31.3,32.9 30.5,32.9 IC3.7 | v4.7,32.1 3.5,32.1 2.7,31.3 2.7,30.9 R18.1 | v28.3,32.9 28.9,32.9 IC3.10 | 31.3,32.9 v31.3,31.7 31,31.39 31,30.99 30.8,30.8 30.1,30.8 30.05,30.86 IC3.3 | v27.5,16.9 28.1,16.9 | C14.1 36.02,25.19 35.42,25.79 33.84,25.79 v33.6,26.03
  Route2 0.15: v28.26,19.94 28.56,19.94 v33.33,24.7
  Bottom 0.2: 27.5,32.1 21.5,32.1 | v28.3,32.9 27.5,32.1 | 27.5,32.1 29.5,30.1 | 29.5,30.1 29.7,29.9 | v31.3,31.7 29.7,30.1 29.5,30.1 | 18.9,26.5 v18.1,26.5 | 18.9,26.5 21.5,29.1 21.5,32.1 | v28.7,28.7 29.7,29.7 29.7,29.9 | v27.5,16.9 25.9,16.9 20.9,21.9 20.9,24.5 18.9,26.5 | 21.5,32.1 10.86,32.1 10.38,32.58 9.82,32.58 9.34,32.1 v4.7,32.1 | 29.7,29.9 33.57,26.03 v33.6,26.03
DEC4_6  (3 unrouted)
  Top 0.2: 37.3,25.9 37.3,26.63 C16.1 | 37.3,25.9 37.3,25.3 C15.1 | 37.3,25.9 36.7,25.9 L3.2
DN  (1 unrouted)
  Top 0.2: J4.B7 23.5,28.5 23.5,27.1 22.3,25.9 21.1,25.9 19.3,24.1 19.3,21.5 19.9,20.9 D3.1
DP  (via drill 0.3)
  Top 0.2: J4.A6 23.1,28.7 23.1,29.3 22.7,29.7 22.3,29.7 22.1,29.5 22.1,28.7 J4.B6 22.1,28.5 22.1,27.9 22.5,27.5 v22.5,27.1 | v22.5,24.5 22.5,21.9 21.9,21.3 21.9,20.9 D3.3
  Bottom 0.2: v22.5,27.1 v22.5,24.5
EPD_3V3  (via drill 0.3)  (1 unrouted)
  Top 0.2: 13.1,15.7 13.1,16.3 C1-EP-DR.1 | 13.1,15.7 13.1,15.5 EPD_C5.2 13.1,15.7 | v10.3,16.3 11.3,16.3 J1.15 | 13.1,15.7 v13.9,15.7 | v6.7,2.5 6.7,2.9 4.1,5.5 L5.2
  Bottom 0.2: v10.3,16.3 13.3,16.3 v13.9,15.7 17.1,12.5 17.1,10.9 15.9,9.7 14.5,9.7 13.7,8.9 13.7,8.7 10.9,5.9 10.1,5.9 v6.7,2.5
GDR  (via drill 0.3)
  Top 0.2: 14.5,16.9 15.1,16.9 15.3,16.7 Q3.1 | v12.3,22.7 11.5,22.7 J1.2 | v13.9,21.1 13.9,17.5 14.5,16.9 | 14.5,16.9 R2_EP_DR.2
  Bottom 0.2: v13.9,21.1 v12.3,22.7
GND  (via drill 0.3)  (18 unrouted)
  Top 0.15: C38.1 12.02,32.84 R9.1
  Top 0.2: 15.7,5.7 14.5,5.7 13.5,4.7 13.5,4.1 SW_DN.1 | 15.7,5.7 16.5,4.9 16.5,2.9 TP_GND2.TP | 15.7,5.7 18.7,8.7 18.7,9.9 D4.1 18.9,10.1 26.1,17.3 26.9,17.3 27.7,18.1 28.5,18.1 28.7,17.9 28.7,17.7 C7.2 28.7,17.5 28.7,15.3 C13.2 28.7,15.1 28.7,14.6 | 36.5,4.1 35.7,4.1 SW_UP.1 | 28.7,14.6 24.5,10.4 24.5,4.1 SW_ENT.1 | 36.5,4.1 36.5,4.5 38.1,6.1 38.1,13.3 v35.9,15.5 35.6,15.2 32.58,15.2 32.5,15.41 C8.2 32.15,15.34 32.15,15.07 31.97,14.89 30.09,14.89 29.8,14.6 28.7,14.6 | 36.5,4.1 C31.1 | X1.4 38.7,19.3 38.7,18.7 C4.2 39.1,18.5 39.7,18.5 C22.2 39.9,18.5 40.7,18.5 41.1,18.9 41.1,19.3 C10.2 41.1,19.5 42.1,20.5 42.1,22.7 v41.1,23.7 41.1,25.64 C20.2 41.37,25.85 40.77,26.45 39.05,26.45 37.97,25.37 | 37.97,25.37 C15.2 | C9.2 38.9,16.5 C3.2 38.9,16.3 v38.9,15.5 | C21.2 30.1,18.7 30.1,18.5 v30.73,17.87 | C12.2 39.1,22.9 39.1,22.5 C11.2 39.1,22.3 | 39.1,22.3 39.1,21.9 | 39.9,21.1 40.9,21.1 C1.2 | 39.9,21.1 39.1,21.9 | 39.1,21.9 C2.2 | 39.9,21.1 X1.2 | 36.3,21.9 36.5,21.7 37.1,21.7 U1.P$F23 | 32.7,22.1 32.9,22.3 32.9,22.9 U1.P$B7 | 32.7,20.7 32.7,19.7 U1.P$83 32.7,19.5 32.7,18.5 U1.P$87 | 33.9,19.5 33.9,18.5 U1.P$88 | 33.9,19.5 U1.P$84 | 33.9,19.5 U1.P$74 | U1.P$89 35.1,18.5 35.1,19.5 U1.P$74 | U1.P$85 34.9,19.7 U1.P$74 | 36.3,20.7 36.3,19.7 U1.P$86 36.3,19.5 36.3,18.5 U1.P$90 | 32.7,20.7 U1.P$79 | 32.7,20.7 U1.P$74 | U1.P$80 33.7,20.9 U1.P$74 | U1.P$81 35.1,20.9 U1.P$74 | 36.3,20.7 U1.P$82 | 36.3,20.7 U1.P$74 | 32.7,22.1 U1.P$75 | 32.7,22.1 U1.P$74 | U1.P$76 33.7,21.9 33.3,21.5 U1.P$74 | U1.P$77 35.1,21.9 35.7,21.3 U1.P$74 | 36.3,21.9 U1.P$78 | 36.3,21.9 U1.P$74 | v39.9,22.3 39.1,22.3 | C43.2 20.1,19.5 20.7,20.1 20.7,20.7 D3.2 20.9,20.9 20.9,21.3 v21.7,22.1
  Top 0.2: 29.5,32.9 29.9,32.9 IC3.8 | 29.5,32.9 29.5,33.3 29.1,33.7 27.5,33.7 27.3,33.5 J4.SH1 | 29.5,32.9 IC3.9 | R2_USB.2 21.9,19.1 22.3,18.7 22.9,18.7 23.1,18.9 23.1,19.1 R1_USB.1 23.1,19.3 26.9,23.1 26.9,28.7 27.3,29.1 J4.SH3 27.3,29.3 27.9,29.9 | 27.9,29.9 28.1,30.1 28.1,30.5 R3.1 28.1,30.7 27.3,31.5 27.3,33.3 J4.SH1 | v28.9,25.9 28.7,25.7 28.7,25.1 C17.1 | 27.9,29.9 29.3,29.9 C19.2 | R_TYPE_SEL.1 17.9,18.5 17.5,18.5 16.1,19.9 15.9,19.9 15.3,20.5 15.3,20.9 SJ1.1 15.1,21.1 14.3,21.9 13.7,21.9 13.5,21.7 13.1,21.7 EPD_C2.1 13.1,21.5 13.1,21.1 EPD_C1.1 13.1,20.9 13.1,17.1 | 10.7,19.7 11.3,19.7 J1.8 | 10.7,19.7 v9.1,21.3 8.7,21.7 8.7,23.9 J1.MP1 | EPD_C11.1 12.1,10.7 12.1,11.3 EPD_C10.1 12.1,11.5 12.1,12.1 EPD_C9.1 12.1,12.3 12.1,12.9 EPD_C8.1 12.1,13.1 12.1,13.9 EPD_C7.1 12.1,14.1 12.1,14.7 EPD_C6.1 12.1,14.9 12.1,15.3 EPD_C5.1 | 13.1,17.1 12.7,17.1 12.1,16.5 C1-EP-DR.2 12.1,16.3 12.1,15.5 EPD_C5.1 | 13.1,17.1 13.5,17.1 14.1,16.5 14.3,16.5 R2_EP_DR.1 | EPD_C5.1 11.9,15.3 11.5,15.3 J1.17 11.3,15.3 10.1,15.3 | 10.1,15.3 8.7,13.9 8.7,11.1 J1.MP2 8.5,10.9 8.5,10.3 6.9,8.7 2.1,8.7 TP_GND.TP | 10.7,19.7 9.5,18.5 9.5,15.9 10.1,15.3 | 13.31,31.5 11.7,31.5 C37.1 12.05,31.8 IC1.D2 | 13.31,31.5 | 13.31,31.5 C39.2 14.1,31.1 16.3,33.3 18.3,33.3 | C24.1 11.9,28.7 11.9,27.9 13.3,26.5 C33.2 13.5,26.7 14.3,26.7 C25.2 14.5,26.7 14.5,27.9 15.1,28.5 17.7,28.5 18.3,29.1 J4.SH4 18.3,29.3 18.3,33.3 | 7.3,30.5 7.5,30.7 7.5,30.9 | 7.3,30.5 7.1,30.3 6.7,30.3 U3.4 | 7.5,30.9 7.5,31.1 U3.9 | U3.1 6.7,31.9 7.1,31.9 7.7,31.3 U3.9 | 7.5,30.9 8.5,30.9 U3.6 | 7.5,30.9 U3.9 | v6.5,27.7 7.3,27.7 IC2.B3
  Top 0.2: v8.7,26.5 8.7,27.5 8.5,27.7 8.3,27.7 IC2.B1 | v12.9,8.9 12.9,9.7 EPD_C12.1 | 18.3,33.3 J4.SH2 18.5,33.3 27.1,33.3 J4.SH1 | v7.99,29.78 7.99,29.81 7.3,30.5 | 37.97,25.37 37.9,25.3 37.9,25.95 38.44,26.49 38.44,26.76 C16.2 38.44,26.9 38.44,27.2 37.48,28.17 32.58,28.17 31.7,27.3 31.7,25.3 31.9,25.1 31.9,24.7 C5.2 32.73,25.38 34.86,25.38 C14.2
  Bottom 0.2: 37.3,17.1 36.1,18.3 U1.P$90 | 37.3,17.1 v38.9,15.5 | U1.P$87 32.5,18.3 32.1,17.9 30.76,17.9 v30.73,17.87 | 39.7,22.3 36.5,22.3 36.3,22.1 U1.P$78 | 39.7,22.3 v41.1,23.7 | 39.7,22.3 v39.9,22.3 | 27.9,28.5 27.3,29.1 J4.SH3 | 27.9,28.5 28.9,27.5 v28.9,25.9 28.9,25.7 32.5,22.1 U1.P$75 | v21.7,22.1 27.9,28.3 27.9,28.5 | 8.7,27.7 16.9,27.7 18.3,29.1 J4.SH4 | 8.7,27.7 8.1,27.7 | 8.1,27.7 v6.5,27.7 | 8.7,27.7 v8.7,26.5 8.7,21.3 | v12.9,8.9 12.9,9.7 8.7,13.9 8.7,21.3 | 8.7,21.3 v9.1,21.3 | v35.9,15.5 37.3,16.9 37.3,17.1 | 8.1,27.7 8.1,29.67 v7.99,29.78
  pour Top: 4.9,34.8 41.9,34.8 46.2,30.5 46.2,13 46,12.8 40.1,12.8 40,12.9 40,12.6 38.7,11.3 38.7,6.9 39.5,6.1 45.9,6.1 45.9,4 41.8,-0.1 4.8,-0.1 0.1,4.6 0.1,10.4 7.1,10.4 7.2,10.5 7.2,24.4 7.1,24.5 0.3,24.5 0.3,30.2
IMU_INT1  (1 unrouted)
IMU_INT2  (1 unrouted)
LX1  (2 unrouted)
LX2  (2 unrouted)
N$1  (1 unrouted)
N$2  (1 unrouted)
  Top 0.2: C3.1 38.3,16.3 38.3,15.9 38.1,15.7 38.1,15.3 38.7,14.7 39.1,14.7 39.7,15.3 39.7,16.5 L1.1
N$3
  Top 0.2: C4.1 39.1,17.9 39.7,17.9 C22.1 39.9,17.9 40.5,17.3 40.5,16.7 L1.2 40.7,16.5 40.7,10.3 41.3,9.7 ANT1.1
N$4
  Top 0.2: U1.P$B24 37.7,22.9 38.1,23.3 38.1,23.5 38.3,23.7 39.5,23.7 41.7,21.5 41.7,20.9 41.3,20.5 41.1,20.5 C1.1 40.9,20.5 39.9,19.5 X1.1
N$5  (1 unrouted)
  Top 0.2: C2.1 38.7,21.7 38.7,21.1 X1.3
N$6  (1 unrouted)
N$7
  Top 0.2: C5.1 31.9,24.1 31.7,24.1 30.72,23.12 30.72,22.74 30.95,22.5 31.02,22.5 U1.P$C1
N$9  (via drill 0.35)
  Top 0.15: U1.P$A18 35.49,23.53 35.49,23.56 34.97,24.08 v34.06,24.08 | v29.4,16.7 29.25,16.55 C13.1
  Route2 0.15: v34.06,24.08 32.61,22.63 32.29,22.63 29.4,19.74 v29.4,16.7
N$10
  Top 0.2: R1_USB.2 22.5,19.3 22.5,19.5 24.1,21.1 24.1,28.5 J4.A5
N$12
  Top 0.15: U1.P$D2 31.4,22.15 31.27,22.03 30.9,22.03 30.34,22.58 30.34,22.75 X2.1
  Top 0.2: X2.1 28.92,24.43 29.31,24.82 C17.2
N$13  (1 unrouted)
  Top 0.2: C18.2 30.3,25.5 29.1,26.7 28.7,26.7 27.72,25.71 27.72,23.48 28.77,22.43 X2.2
N$14
  Top 0.15: IC1.D1 11.84,32.48 R9.2
N$15  (1 unrouted)
N$16
  Top 0.2: C2-EP-DR.2 17.7,15.1 17.7,13.9 17.5,13.7 D5.2 17.3,13.5 17.3,13.1 15.5,11.3 15.5,8.7 12.7,5.9 8.9,5.9 8.7,5.7 L5.1
N$17  (1 unrouted)
N$18
  Top 0.2: Q3.3 16.1,18.5 18.7,15.9 18.7,15.3 C2-EP-DR.1 18.9,15.1 18.9,13.7 D4.2 18.9,13.5 20.1,13.5 D2.1
N$19  (1 unrouted)
N$20  (via drill 0.3)
  Top 0.2: v21.7,25.1 21.9,25.3 22.7,25.3 23.3,24.7 23.3,20.9 22.1,19.7 21.9,19.7 R2_USB.1 | v20.9,26.7 20.9,27.7 21.1,27.9 21.1,28.5 J4.B5
  Bottom 0.2: v21.7,25.1 21.7,25.9 v20.9,26.7
N$21
  Top 0.2: EPD_C2.2 11.9,21.7 11.5,21.7 J1.4
N$22
  Top 0.2: R3.2 28.7,30.7 28.7,31.1 28.9,31.3 IC3.1
N$23
  Top 0.2: C32.2 7.7,26.3 7.7,27.1 IC2.A2
N$24  (via drill 0.3)
  Top 0.2: v12.3,19.9 12.1,20.1 12.1,20.9 EPD_C1.2 | v10.3,21.1 10.7,21.1 10.9,21.3 11.3,21.3 J1.5
  Bottom 0.2: v12.3,19.9 11.5,19.9 v10.3,21.1
N$25
  Top 0.2: R1_EP_DR.1 18.1,17.9 18.5,18.3 18.5,18.7 18.1,19.1 R_TYPE_SEL.2 17.9,19.1 17.9,19.9 16.9,20.9 SJ1.2
N$27
  Top 0.2: L3.1 34.7,28.92 L2.2
N$32  (via drill 0.3)
  Top 0.2: v13.9,14.7 13.1,14.7 EPD_C6.2 | v10.3,14.5 10.5,14.5 10.7,14.7 11.3,14.7 J1.18
  Bottom 0.2: v13.9,14.7 10.5,14.7 v10.3,14.5
N$34  (1 unrouted)
N$35  (1 unrouted)
N$37  (1 unrouted)
N$39
  Top 0.2: EPD_C12.2 11.9,9.9 11.7,9.9 11.5,10.1 11.5,11.7 J1.24
OUT+  (1 unrouted)
OUT-  (1 unrouted)
P0.13/1.5D  (1 unrouted)
  Top 0.2: R5.1 25.9,3.5 26.7,4.3 32.5,4.3 32.7,4.1 SW_UP.2
P0.14/1.5D  (via drill 0.3)  (1 unrouted)
  Top 0.2: v37.9,4.5 36.9,3.5 R8.1 | v20.7,3.9 21.5,3.9 SW_ENT.2
  Bottom 0.2: v37.9,4.5 38.7,3.7 38.7,3.3 38.1,2.7 37.5,2.7 36.3,3.9 v20.7,3.9
P1.01/1.6C
  Top 0.2: R_PWR_EPD.1 14.7,24.5 15.5,25.3 Q1.1
P1.02/1.6C  (via drill 0.3)
  Top 0.2: C29.2 15.1,2.9 15.1,3.3 14.7,3.7 14.7,3.9 R7.1 14.7,4.1 v14.7,4.9 | v10.9,5.1 10.9,4.3 10.7,4.1 SW_DN.2
  Bottom 0.2: v14.7,4.9 11.1,4.9 v10.9,5.1
PMIC_INT  (1 unrouted)
PREVGH  (via drill 0.3)
  Top 0.2: v13.9,12.1 13.1,12.1 EPD_C9.2 | v16.3,11.1 17.3,10.1 D5.1 | v10.3,13.3 11.3,13.3 J1.21
  Bottom 0.2: v16.3,11.1 15.3,12.1 v13.9,12.1 12.7,13.3 v10.3,13.3
PREVGL  (via drill 0.3)
  Top 0.2: 13.7,8.9 13.7,8.7 13.1,8.1 12.7,8.1 10.5,10.3 10.5,11.9 10.9,12.3 11.3,12.3 J1.23 | 13.7,8.9 13.7,10.3 13.5,10.5 13.1,10.5 EPD_C11.2 | v19.5,8.9 20.1,9.5 20.1,9.9 D2.2 | 13.7,8.9 v14.7,8.9
  Bottom 0.2: v14.7,8.9 v19.5,8.9
RESE  (via drill 0.3)
  Top 0.2: v18.7,16.9 18.5,16.9 18.1,17.3 R1_EP_DR.2 | v16.9,15.5 16.9,16.3 16.7,16.5 Q3.2 | v10.3,22.3 11.3,22.3 J1.3
  Bottom 0.2: v18.7,16.9 18.3,16.9 17.3,15.9 | v16.9,15.5 17.3,15.9 | v10.3,22.3 10.9,22.3 17.3,15.9
RESET  (2 unrouted)
SCL/1.4C  (1 unrouted)
SCL/2.4C  (via drill 0.35)  (2 unrouted)
  Top 0.15: IC1.B1 13.7,33.33 v13.7,33.5 | v10.1,31.9 10.1,29.21 TP_SCL.TP
  Top 0.2: R4.1 11.5,26.9 10.5,26.9 R17.2 10.3,26.9 10.1,26.9 9.9,27.1 9.9,28.5 10.3,28.9 TP_SCL.TP
  Route2 0.15: v13.7,33.5 13.5,33.7 10.9,33.7 10.1,32.9 v10.1,31.9
SDA/1.4C  (1 unrouted)
SDA/2.4C  (via drill 0.3)  (2 unrouted)
  Top 0.2: R18.2 3.3,30.9 3.3,30.5 2.5,29.7 2.5,29.1 TP_SDA.TP 2.5,28.9 4.1,28.9 4.5,28.5 v4.9,28.5 | v28.1,27.1 30.1,29.1 30.1,30.23 29.5,30.83 29.5,31.3 IC3.2 | U1.P$L1 31.1,20.5 29.95,19.34 28.63,19.34 28.54,19.26 27.98,19.26 27.54,19.7 v27.33,19.7
  Route2 0.2: v4.9,28.5 17.9,28.5 18.5,27.9 27.3,27.9 v28.1,27.1
  Bottom 0.2: v28.1,27.1 28.1,20.73 27.59,20.22 27.59,19.95 v27.33,19.7
SWDCLK  (2 unrouted)
SWDIO  (2 unrouted)
SWO  (1 unrouted)
VBAT/1.2A  (1 unrouted)
  Top 0.2: U3.3 6.7,30.9 6.7,31.3 U3.2 6.5,31.3 5.7,31.3 4.7,30.3 TP_GND1.TP
VBAT/2.5C
  Top 0.15: C37.2 12.45,31.83 IC1.C2
VBUS/1.5D  (via drill 0.3)  (3 unrouted)
  Top 0.2: v20.9,18.5 20.1,18.5 C43.1 | v20.1,22.1 20.7,22.7 20.7,23.3 D3.5
  Bottom 0.2: v20.9,18.5 20.9,21.3 v20.1,22.1
VBUS/2.6D  (2 unrouted)
  Top 0.2: C38.2 12.9,32.9 12.9,33.1 12.2,33.8 10.58,33.8 9.31,32.53 9.31,30.18 8.9,29.77 | 8.89,29.76 8.89,28.13 9.5,27.52 9.5,26.9 14.1,22.3 17.3,22.3 19.3,20.3 19.3,17.9 19.5,17.7 26.7,17.7 27.7,18.7 28.9,18.7 C21.1 29.1,18.7 29.1,18.57 30.77,16.9 U1.P$AD2
VREG  (4 unrouted)
  Top 0.2: 13.9,30.3 14.3,30.3 14.9,30.9 C39.1 15.1,31.1 15.5,31.5 16.7,31.5 TP_VREG.TP | 13.9,30.3 13.7,30.3 C23.2 | 13.9,30.3 13.3,29.7 11.95,29.7 11.85,29.83 C24.2